# Altium PCB 100 x 50 mm  v2.PcbDoc
Units mm, origin at the board's own origin, x right, y up, seen from the top; angles counter-clockwise.
Board outline 100 x 50 mm, 2 copper layers (Top Layer, Bottom Layer); 3 components, 0 nets, 32 pads, 0 vias.
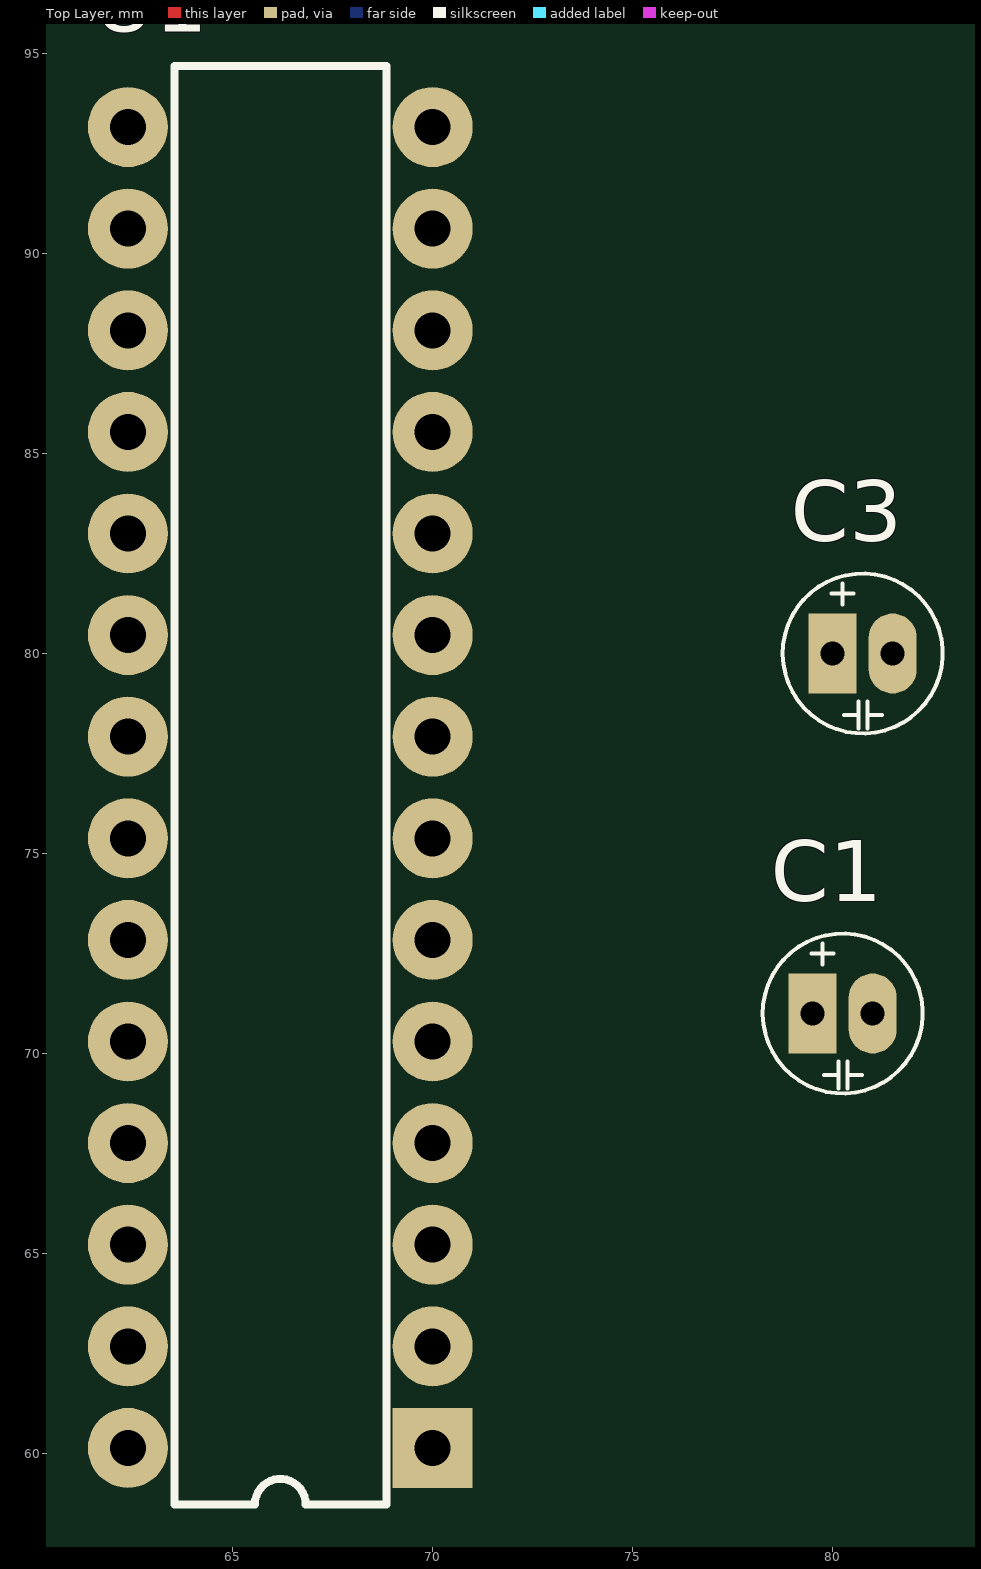
[diagram p0: Top Layer view]
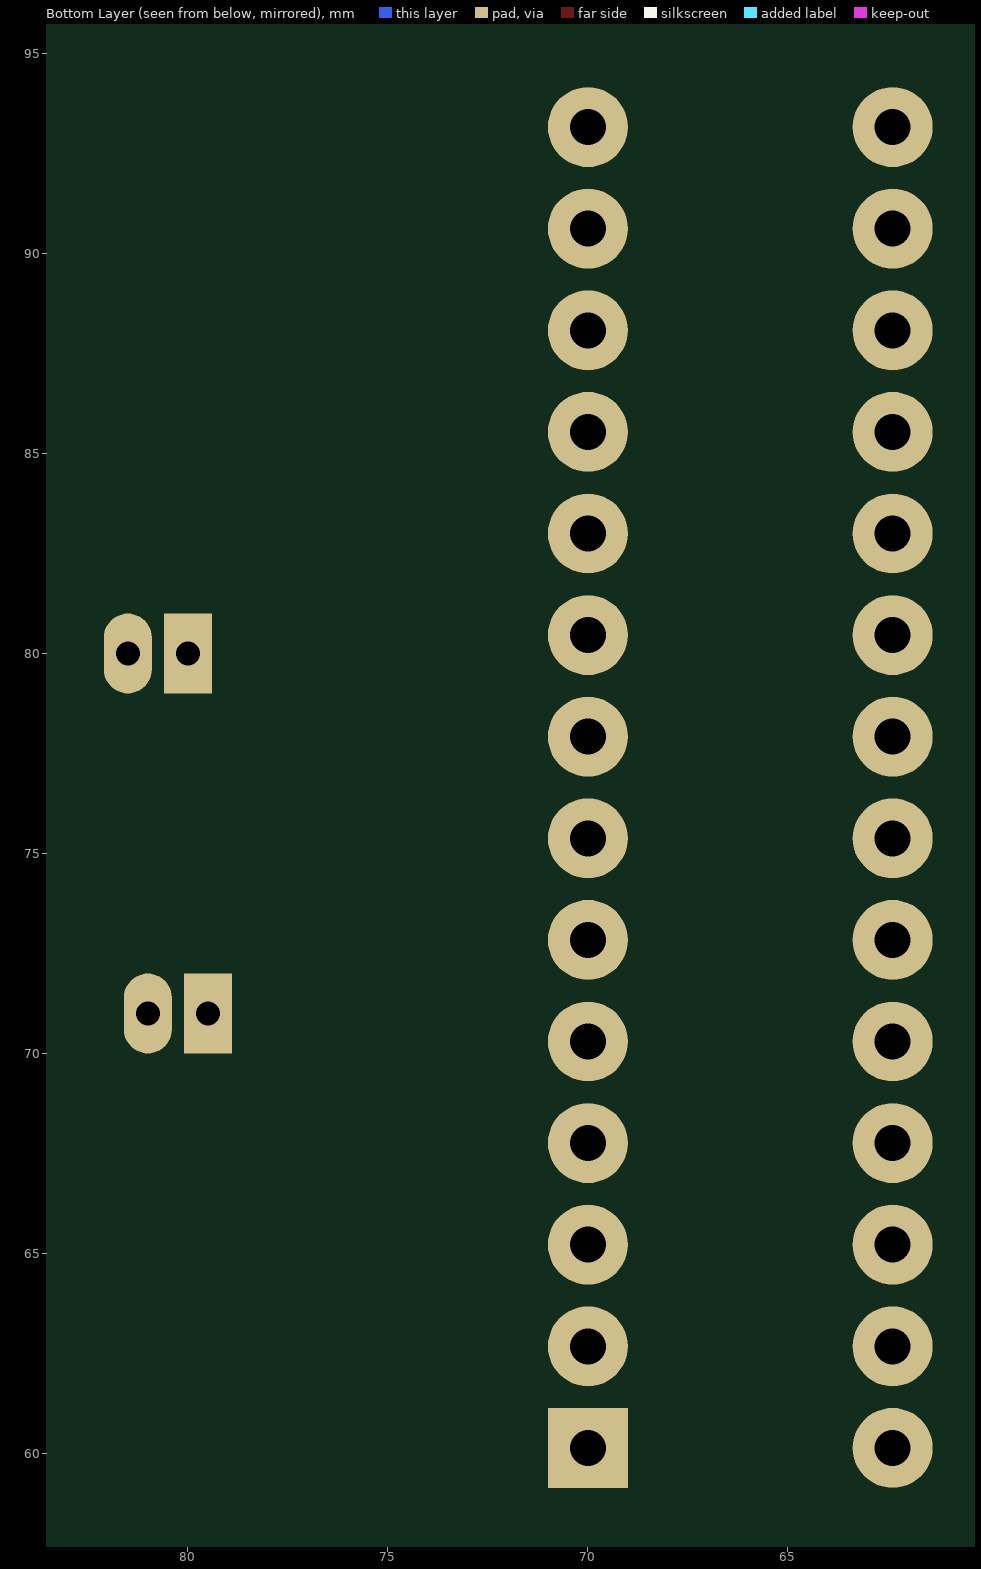
[diagram p1: Bottom Layer view, seen from below]

## Layer stack, top to bottom
Top Solder: solder mask 0.0102, Solder Resist, Dk 3.5
Top Layer: signal copper 0.0356
Dielectric 1: dielectric 0.32, FR-4, Dk 4.8
Bottom Layer: signal copper 0.0356
Bottom Solder: solder mask 0.0102, Solder Resist, Dk 3.5

## Board outline
50,50 150,50 150,100 50,100

## Design rules (kind name [scope] priority, off if disabled: settings)
Clearance [All] p1: gap=0.3 ignorepadtopadclearanceinfootprint=FALSE except(0: Arc-Hole Track-Hole SMDPad-Hole THPad-Hole Via-Hole Fill-Hole Poly-Hole Region-Hole Text-Hole)
ComponentClearance [All] p1: gap=0.01 collisioncheckmode=3 verticalgap=0.2 showdistances=FALSE
Height [All] p1: minheight=0 maxheight=25 prefheight=12.7
HoleSize [All] p1: absolutevalues=TRUE maxlimit=3.2 minlimit=0.4 maxpercent=80.000 minpercent=20.000
HoleToHoleClearance [All] p1: gap=0.2 allowstackedmicrovias=TRUE
PlaneClearance [All] p1: clearance=0.5
PlaneConnect [All] p1: planeconnectstyle=Relief reliefexpansion=0.508 reliefentries=4 reliefconductorwidth=0.5 reliefairgap=0.5
PolygonConnect [All] p1: connectstyle=Relief reliefconductorwidth=0.5 reliefentries=4 polygonreliefangle="90 Angle" airgapwidth=0.5
RoutingVias [All] p1: holewidth=0.7 width=1.5 viastyle="Through Hole" minholewidth=0.4 minwidth=0.4 maxholewidth=3.2 maxwidth=7
SilkToSilkClearance [All] p1: silktosilkclearance=0.05
SilkToSolderMaskClearance [IsPad] p1: minsilkscreentomaskgap=0.2 clearancetoexposedcopper=TRUE
SolderMaskExpansion [All] p1: expansion=0.1 istentingtop=FALSE
Width [All] p1: maxlimit=3 minlimit=0.2 preferedwidth=0.5
22 further rules are at their usual default settings.

## Components (designator, comment, footprint, x,y, rotation, side; value= is the part's Value field where it differs from the comment)
C1 "0.01mF" "Cap E p1.5mm D4xH8 (2p)" 79.5,71 r0 top
C3 "0.01mF" "Cap E p1.5mm D4xH8 (2p)" 80,80 r0 top
U1 "PWM Led Driver" DIP-28 70,60.14 r90 top

## Footprints (in the part's own frame and the unit in brackets; to place one, negate y for a bottom-side part, rotate by r counter-clockwise, add the part's x,y. Pads: shape width x height; smd on the part's side, far side on the other; paste and mask are expansions set on the pad)
"Cap E p1.5mm D4xH8 (2p)" [mm] "D 4mm; H 8mm"
  rect 1.2x2 hole 0.6: 1(0,0)
  oval 1.2x2 hole 0.6: 2(1.5,0)
  silkscreen extent -1.25,-2 2.75,2, body extent -1.25,-2 2.74,2, height 7.31
DIP-28 [mm] "DIP; 28 Leads; Row Spacing 7.62 mm; Pitch 2.54 mm"
  rect 2x2 hole 0.9: 1(0,0)
  round 2 hole 0.9: 2(2.54,0) 3(5.08,0) 4(7.62,0) 5(10.16,0) 6(12.7,0) 7(15.24,0) 8(17.78,0) 9(20.32,0) 10(22.86,0) 11(25.4,0) 12(27.94,0) 13(30.48,0) 14(33.02,0) 15(33.02,7.62) 16(30.48,7.62) 17(27.94,7.62) 18(25.4,7.62) 19(22.86,7.62) 20(20.32,7.62) 21(17.78,7.62) 22(15.24,7.62) 23(12.7,7.62) 24(10.16,7.62) 25(7.62,7.62) 26(5.08,7.62) 27(2.54,7.62) 28(0,7.62)
  silkscreen extent -1.41,1.16 34.55,6.46, body extent -1.45,-0.11 34.55,7.76, height 5.08

## Part data
C1 C3: library part "Cap E 100mF x 10V", "Capacitor"
U1: library part TLC5940, "16-Channel LED Driver With DOT Correction and Grayscale PWM Control", DataSheet=http://www.ti.com/lit/ds/symlink/tlc5940.pdf

## Nets (pads, with @x,y where several pads share a name; then routed paths per layer and width w, separated by ;. In a path a pad name is that pad's centre, name@x,y a point inside that pad or via, vN(x,y) a via of type N, cw(c..) or ccw(c..) an arc to the next point about the centre after c; other vN are vias at no path point)
pads on no net: C1.1 C1.2 C3.1 C3.2 U1.1 U1.2 U1.3 U1.4 U1.5 U1.6 U1.7 U1.8 U1.9 U1.10 U1.11 U1.12 U1.13 U1.14 U1.15 U1.16 U1.17 U1.18 U1.19 U1.20 U1.21 U1.22 U1.23 U1.24 U1.25 U1.26 U1.27 U1.28

## Other copper
Top Layer:
  text ".Layer_Name" at 133.975,101.7 h1
Bottom Layer:
  text ".Layer_Name" at 65,102 h1

## Silkscreen, mask and mechanical layers (free items; w line width, h text height)
Top Overlay:
  text ".Layer_Name" at 133.975,101.7 h1
Bottom Overlay:
  text ".Layer_Name" at 65,102 h1
Top Solder:
  text ".Layer_Name" at 133.975,101.7 h1
Bottom Solder:
  text ".Layer_Name" at 65,102 h1
Mechanical 2:
  text "70 x 70 mm" at 51,105.25 h1
  text ": Def Plate" at 50.975,103.475 h1
  text ".Pcb_File_Name_No_Path" at 50.925,101.425 h1
Mechanical 3:
  text "70 x 70 mm" at 149,105.25 h1
  text ": Def Plate" at 148.975,103.475 h1
  text ".Pcb_File_Name_No_Path" at 148.925,101.425 h1

## Dimensions
50,49 to 150,49 on Mechanical 3
49,100 to 49,50 on Mechanical 3
49,100 to 49,50 on Mechanical 2
50,49 to 150,49 on Mechanical 2